# Altium PCB uTCA_MCH_PCB3.pcbdoc (part 4 of 8)
Units mm, origin at the board's own origin, x right, y up, seen from the top; angles counter-clockwise.
Board outline 182.75 x 75.8 mm, 10 copper layers (Top Layer, GND1, MidLayer1, PWR1, Mid-Layer 2, GND2, PWR2, Mid-Layer 3, GND3, Bottom Layer), stack 1.568 mm thick; 778 components, 977 nets, 4756 pads, 1214 vias.
Unrouted connection lines stored in the file: 1790.
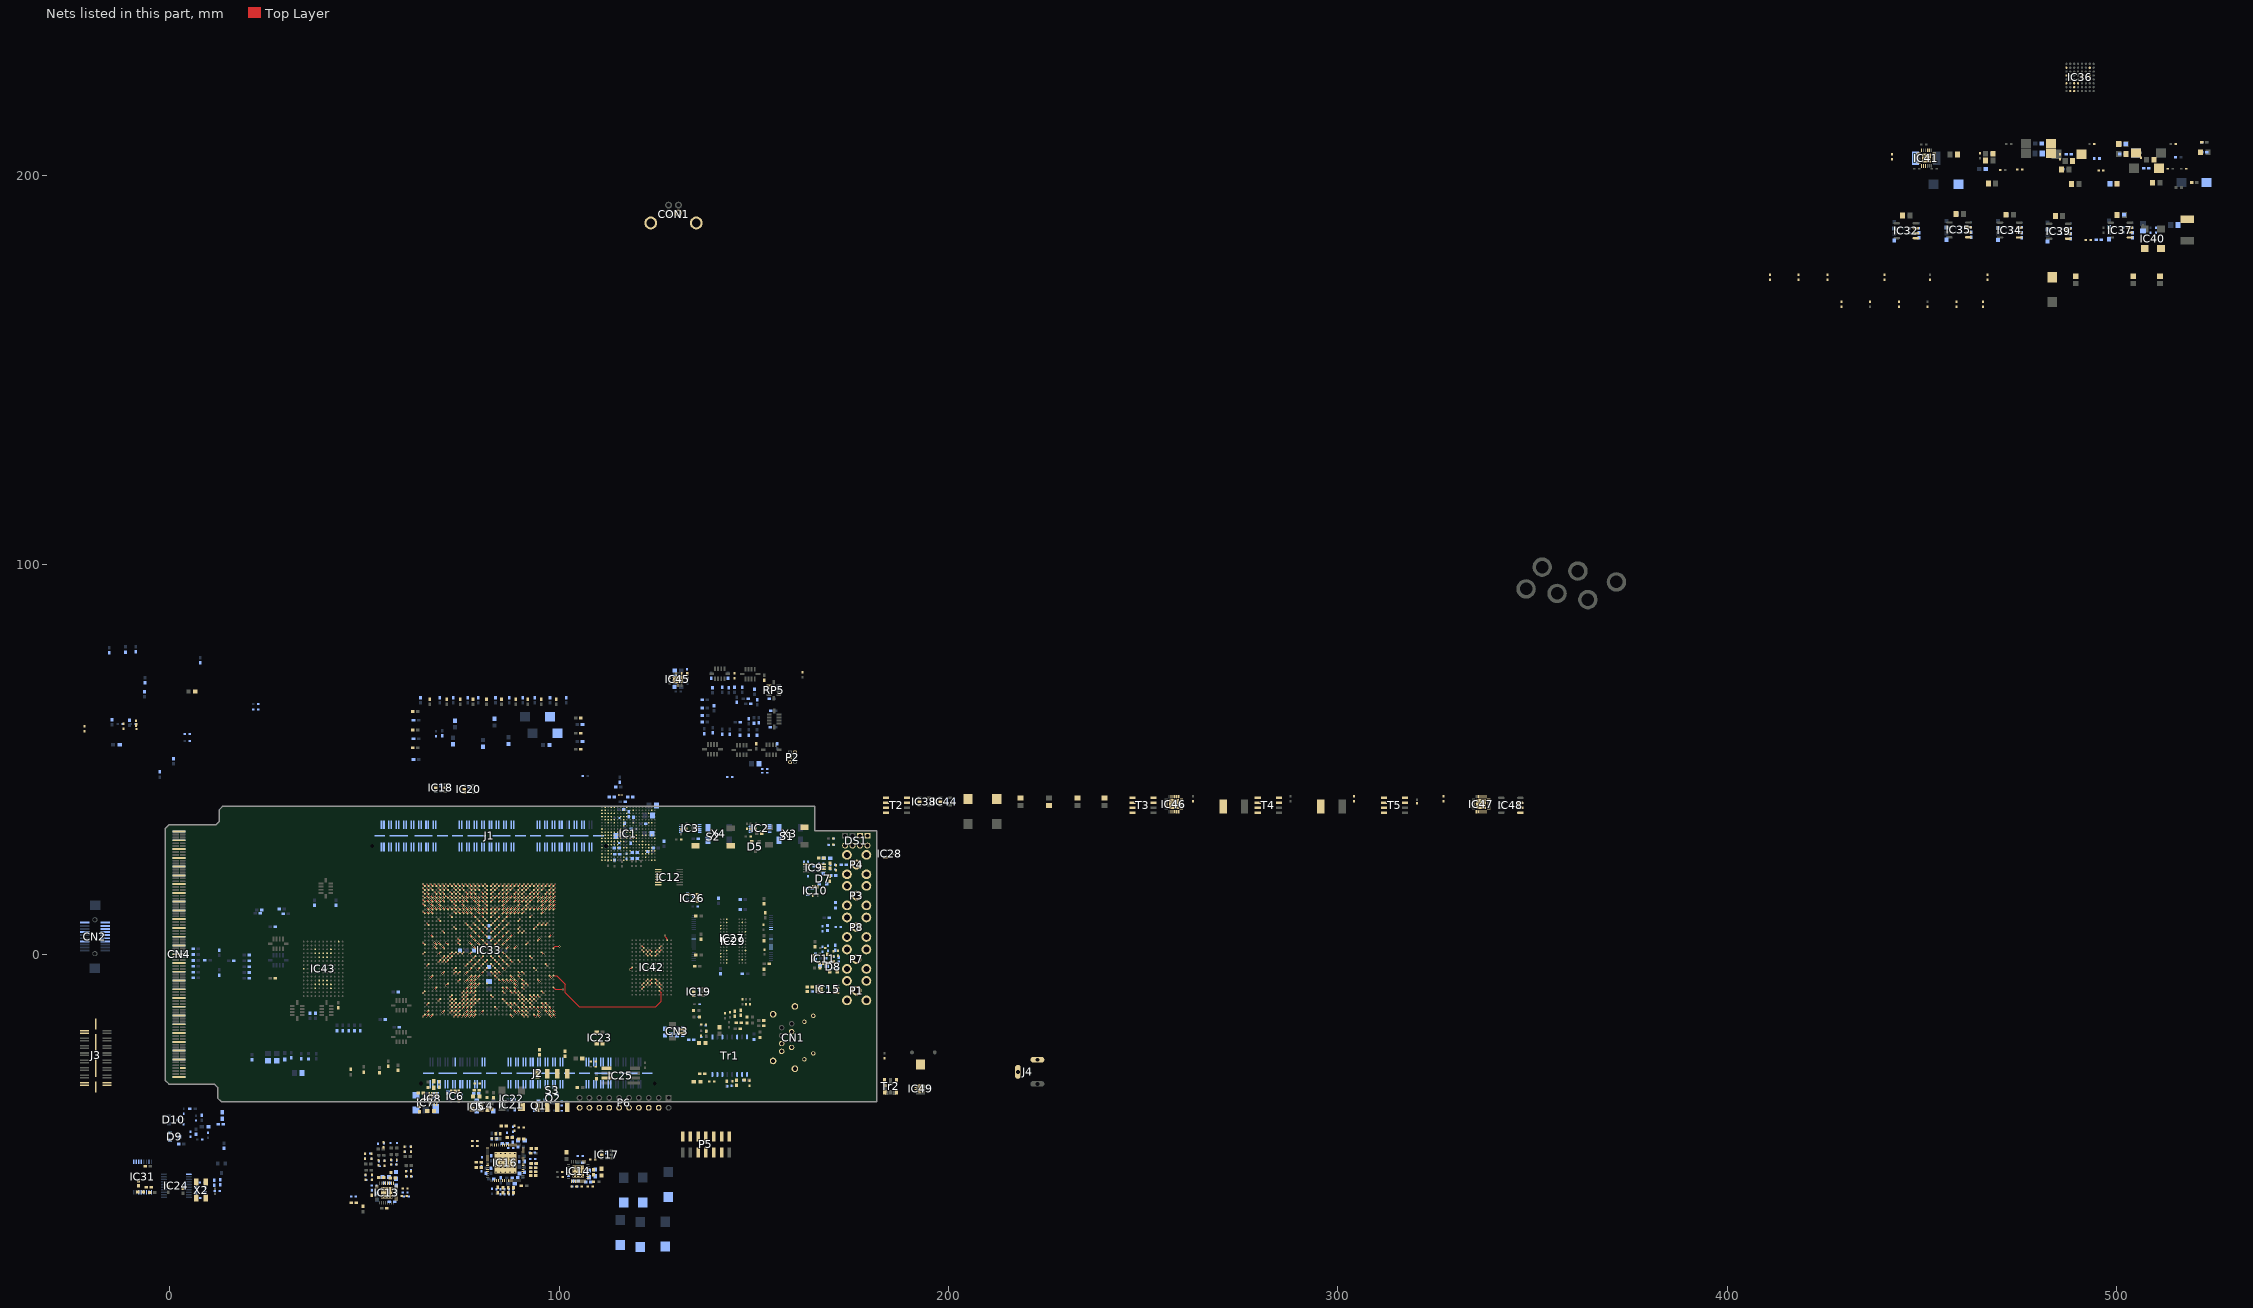
[diagram p12: the nets of this part, all layers, seen from the top]

## Via types
v1: diameter 0.5, hole 0.2, Top Layer to Bottom Layer, 1149 vias
v2: diameter 0.508, hole 0.254, Top Layer to Bottom Layer, 32 vias
v3: diameter 0.66, hole 0.33, Top Layer to Bottom Layer, tented top, 29 vias
v4: diameter 0.5, hole 0.2, Top Layer to Bottom Layer, tented top, 4 vias

## Nets (pads, with @x,y where several pads share a name; then routed paths per layer and width w, separated by ;. In a path a pad name is that pad's centre, name@x,y a point inside that pad or via, vN(x,y) a via of type N, cw(c..) or ccw(c..) an arc to the next point about the centre after c; other vN are vias at no path point) (continued)
EBI1_A15: IC1.V8 IC33.P25 | length 0.7
  Top Layer w0.175: IC33.P25@85.5,-6.5 v1(86,-7)
EBI1_A16: IC1.U9 IC33.M28 | length 0.7
  Top Layer w0.175: IC33.M28@87.5,-9.5 v1(88,-10)
EBI1_A17: IC1.R9 IC33.L28 | length 0.7
  Top Layer w0.175: IC33.L28@88.5,-9.5 v1(89,-10)
EBI1_A18: IC1.T9 IC33.M32 | length 0.7
  Top Layer w0.175: IC33.M32@87.5,-13.5 v1(88,-14)
EBI1_A19: IC1.P9 IC33.L33 | length 0.7
  Top Layer w0.175: IC33.L33@88.5,-14.5 v1(89,-15)
EBI1_A20: IC1.V9 IC33.P27 | length 0.7
  Top Layer w0.175: IC33.P27@85.5,-8.5 v1(86,-9)
EBI1_A21: IC1.M9 IC33.N27 | length 0.7
  Top Layer w0.175: IC33.N27@86.5,-8.5 v1(87,-9)
EBI1_A22: IC1.N9 IC33.P30 | length 0.7
  Top Layer w0.175: IC33.P30@85.5,-11.5 v1(86,-12)
EBI1_D0: IC1.T10 IC33.J29 | length 0.7
  Top Layer w0.175: IC33.J29@90.5,-10.5 v1(91,-11)
EBI1_D1: IC1.R10 IC33.K28 | length 0.7
  Top Layer w0.175: IC33.K28@89.5,-9.5 v1(90,-10)
EBI1_D2: IC1.N10 IC33.B34 | length 0.7
  Top Layer w0.175: IC33.B34@97.5,-15.5 v1(98,-16)
EBI1_D3: IC1.U11 IC33.C33 | length 0.7
  Top Layer w0.175: IC33.C33@96.5,-14.5 v1(97,-15)
EBI1_D4: IC1.P12 IC33.H30 | length 0.7
  Top Layer w0.175: IC33.H30@91.5,-11.5 v1(92,-12)
EBI1_D5: IC1.V11 IC33.G31 | length 0.7
  Top Layer w0.175: IC33.G31@92.5,-12.5 v1(93,-13)
EBI1_D6: IC1.N11 IC33.B33 | length 0.7
  Top Layer w0.175: IC33.B33@97.5,-14.5 v1(98,-15)
EBI1_D7: IC1.T11 IC33.A33 | length 0.7
  Top Layer w0.175: IC33.A33@98.5,-14.5 v1(99,-15)
EBI1_D8: IC1.R11 IC33.G30 | length 0.7
  Top Layer w0.175: IC33.G30@92.5,-11.5 v1(93,-12)
EBI1_D9: IC1.N12 IC33.F30 | length 0.7
  Top Layer w0.175: IC33.F30@93.5,-11.5 v1(94,-12)
EBI1_D10: IC1.P13 IC33.E33 | length 0.7
  Top Layer w0.175: IC33.E33@94.5,-14.5 v1(95,-15)
EBI1_D11: IC1.V12 IC33.E32 | length 0.7
  Top Layer w0.175: IC33.E32@94.5,-13.5 v1(95,-14)
EBI1_D12: IC1.R12 IC33.J27 | length 0.7
  Top Layer w0.175: IC33.J27@90.5,-8.5 v1(91,-9)
EBI1_D13: IC1.U12 IC33.J26 | length 0.7
  Top Layer w0.175: IC33.J26@90.5,-7.5 v1(91,-8)
EBI1_D14: IC1.T12 IC33.B32 | length 0.7
  Top Layer w0.175: IC33.B32@97.5,-13.5 v1(98,-14)
EBI1_D15: IC1.R13 IC33.C32 | length 0.7
  Top Layer w0.175: IC33.C32@96.5,-13.5 v1(97,-14)
EBI1_D16: IC1.P3 IC33.J32 | length 0.7
  Top Layer w0.175: IC33.J32@90.5,-13.5 v1(91,-14)
EBI1_D17: IC1.U1 IC33.J31 | length 0.7
  Top Layer w0.175: IC33.J31@90.5,-12.5 v1(91,-13)
EBI1_D18: IC1.R3 IC33.L26 | length 0.7
  Top Layer w0.175: IC33.L26@88.5,-7.5 v1(89,-8)
EBI1_D19: IC1.T3 IC33.L25 | length 0.7
  Top Layer w0.175: IC33.L25@88.5,-6.5 v1(89,-7)
EBI1_D20: IC1.U2 IC33.H32 | length 0.7
  Top Layer w0.175: IC33.H32@91.5,-13.5 v1(92,-14)
EBI1_D21: IC1.T4 IC33.G32 | length 0.7
  Top Layer w0.175: IC33.G32@92.5,-13.5 v1(93,-14)
EBI1_D22: IC1.V2 IC33.J34 | length 0.7
  Top Layer w0.175: IC33.J34@90.5,-15.5 v1(91,-16)
EBI1_D23: IC1.U3 IC33.K33 | length 0.7
  Top Layer w0.175: IC33.K33@89.5,-14.5 v1(90,-15)
EBI1_D24: IC1.U4 IC33.D32 | length 0.7
  Top Layer w0.175: IC33.D32@95.5,-13.5 v1(96,-14)
EBI1_D25: IC1.R4 IC33.D31 | length 0.7
  Top Layer w0.175: IC33.D31@95.5,-12.5 v1(96,-13)
EBI1_D26: IC1.T5 IC33.H33 | length 0.7
  Top Layer w0.175: IC33.H33@91.5,-14.5 v1(92,-15)
EBI1_D27: IC1.V3 IC33.H34 | length 0.7
  Top Layer w0.175: IC33.H34@91.5,-15.5 v1(92,-16)
EBI1_D28: IC1.U5 IC33.K29 | length 0.7
  Top Layer w0.175: IC33.K29@89.5,-10.5 v1(90,-11)
EBI1_D29: IC1.V4 IC33.J30 | length 0.7
  Top Layer w0.175: IC33.J30@90.5,-11.5 v1(91,-12)
EBI1_D30: IC1.R5 IC33.F34 | length 0.7
  Top Layer w0.175: IC33.F34@93.5,-15.5 v1(94,-16)
EBI1_D31: IC1.T6 IC33.E34 | length 0.7
  Top Layer w0.175: IC33.E34@94.5,-15.5 v1(95,-16)
EBI1_NBS1: IC1.V10 IC33.L31 | length 0.7
  Top Layer w0.175: IC33.L31@88.5,-12.5 v1(89,-13)
EBI1_NCS0: IC1.P10 IC33.K32 | length 0.7
  Top Layer w0.175: IC33.K32@89.5,-13.5 v1(90,-14)
EBI1_NRD: IC1.U10 IC33.M25 | length 0.7
  Top Layer w0.175: IC33.M25@87.5,-6.5 v1(88,-7)
EBI1_NWAIT: IC1.P6 IC33.M31 | length 0.7
  Top Layer w0.175: IC33.M31@87.5,-12.5 v1(88,-13)
EBI1_NWE: IC1.P11 IC33.N25 | length 0.7
  Top Layer w0.175: IC33.N25@86.5,-6.5 v1(87,-7)
ETH_100MHZ.LED_ACT: CN1.10 IC41.3
ETH_100MHZ.LED_LINK: CN1.11 IC41.2 R199.2
ETH_100MHZ.RX_N: CN1.6 Tr1.9
ETH_100MHZ.RX_P: CN1.3 Tr1.11
ETH_100MHZ.SHIELD: C214.1 CN1.0 Tr1.10 Tr1.15
ETH_100MHZ.TX_N: CN1.2 Tr1.14
ETH_100MHZ.TX_P: CN1.1 Tr1.16
EXT_PROGRAM_B: D9.1 J1.85
EXT_VBB: C47.2 IC9.4 IC10.3
FPGA_25MHZ_CLK_N: IC21.3 IC33.K23 | length 0.7
  Top Layer w0.125: IC33.K23@89.5,-4.5 v1(90,-5)
FPGA_25MHZ_CLK_P: IC21.4 IC33.K24 | length 0.7
  Top Layer w0.125: IC33.K24@89.5,-5.5 v1(90,-6)
FPGA_CCLK: IC1.K16 R158.1
FPGA_DIN: IC1.K18 R179.2
FPGA_DONE: DS1.6 IC1.L17 J1.87 Q1.3
FPGA_GCLK_N: IC33.E11 J1.91 | length 0.7
  Top Layer w0.125: IC33.E11@94.5,7.5 v1(95,8)
FPGA_GCLK_P: IC33.D11 J1.89 | length 0.7
  Top Layer w0.125: IC33.D11@95.5,7.5 v1(96,8)
FPGA_GPIO0: IC33.AC25 J2.2 | length 0.7
  Top Layer w0.175: v1(76,-7) IC33.AC25@76.5,-6.5
FPGA_GPIO1: IC33.AB25 J2.4 | length 0.7
  Top Layer w0.175: v1(77,-7) IC33.AB25@77.5,-6.5
FPGA_GPIO2: IC33.AF31 J2.6 | length 0.7
  Top Layer w0.175: v1(73,-13) IC33.AF31@73.5,-12.5
FPGA_GPIO3: IC33.AG31 J2.8 | length 0.7
  Top Layer w0.175: v1(72,-13) IC33.AG31@72.5,-12.5
FPGA_GPIO4: IC33.AB26 J2.10 | length 0.7
  Top Layer w0.175: v1(77,-8) IC33.AB26@77.5,-7.5
FPGA_GPIO5: IC33.AA26 J2.12 | length 0.7
  Top Layer w0.175: v1(78,-8) IC33.AA26@78.5,-7.5
FPGA_GPIO6: IC33.AG32 J2.14 | length 0.7
  Top Layer w0.175: v1(72,-14) IC33.AG32@72.5,-13.5
FPGA_GPIO7: IC33.AG33 J2.16 | length 0.7
  Top Layer w0.175: v1(72,-15) IC33.AG33@72.5,-14.5
FPGA_GPIO8: IC33.AC27 J2.18 | length 0.7
  Top Layer w0.175: v1(76,-9) IC33.AC27@76.5,-8.5
FPGA_GPIO9: IC33.AB27 J2.20 | length 0.7
  Top Layer w0.175: v1(77,-9) IC33.AB27@77.5,-8.5
FPGA_GPIO10: IC33.AE32 J2.22 | length 0.7
  Top Layer w0.175: v1(74,-14) IC33.AE32@74.5,-13.5
FPGA_GPIO11: IC33.AD32 J2.24 | length 0.7
  Top Layer w0.175: v1(75,-14) IC33.AD32@75.5,-13.5
FPGA_GPIO12: IC33.AC28 J2.26 | length 0.7
  Top Layer w0.175: v1(76,-10) IC33.AC28@76.5,-9.5
FPGA_GPIO13: IC33.AB28 J2.28 | length 0.7
  Top Layer w0.175: v1(77,-10) IC33.AB28@77.5,-9.5
FPGA_GPIO14: IC33.AC32 J2.30 | length 0.7
  Top Layer w0.175: v1(76,-14) IC33.AC32@76.5,-13.5
FPGA_GPIO15: IC33.AB32 J2.32 | length 0.7
  Top Layer w0.175: v1(77,-14) IC33.AB32@77.5,-13.5
FPGA_GPIO16: IC33.AC29 J2.34 | length 0.7
  Top Layer w0.175: v1(76,-11) IC33.AC29@76.5,-10.5
FPGA_GPIO17: IC33.AD29 J2.36 | length 0.7
  Top Layer w0.175: v1(75,-11) IC33.AD29@75.5,-10.5
FPGA_GPIO18: IC33.AF33 J2.38 | length 0.7
  Top Layer w0.175: v1(73,-15) IC33.AF33@73.5,-14.5
FPGA_GPIO19: IC33.AE33 J2.40 | length 0.7
  Top Layer w0.175: v1(74,-15) IC33.AE33@74.5,-14.5
FPGA_GPIO20: IC33.AC30 J2.42 | length 0.7
  Top Layer w0.175: v1(76,-12) IC33.AC30@76.5,-11.5
FPGA_GPIO21: IC33.AD30 J2.44 | length 0.7
  Top Layer w0.175: v1(75,-12) IC33.AD30@75.5,-11.5
FPGA_GPIO22: IC33.AF34 J2.46 | length 0.7
  Top Layer w0.175: v1(73,-16) IC33.AF34@73.5,-15.5
FPGA_GPIO23: IC33.AE34 J2.48 | length 0.7
  Top Layer w0.175: v1(74,-16) IC33.AE34@74.5,-15.5
FPGA_GPIO24: IC33.AA29 J2.50 | length 0.7
  Top Layer w0.175: v1(78,-11) IC33.AA29@78.5,-10.5
FPGA_GPIO25: IC33.AA28 J2.52 | length 0.7
  Top Layer w0.175: v1(78,-10) IC33.AA28@78.5,-9.5
FPGA_GPIO26: IC33.Y26 J2.54 | length 0.7
  Top Layer w0.175: v1(79,-8) IC33.Y26@79.5,-7.5
FPGA_GPIO27: IC33.AA25 J2.56 | length 0.7
  Top Layer w0.175: v1(78,-7) IC33.AA25@78.5,-6.5
FPGA_GPIO28: IC33.AD31 J2.58 | length 0.7
  Top Layer w0.175: v1(75,-13) IC33.AD31@75.5,-12.5
FPGA_GPIO29: IC33.AE31 J2.60 | length 0.7
  Top Layer w0.175: v1(74,-13) IC33.AE31@74.5,-12.5
FPGA_GPIO30: IC33.AB33 J2.62 | length 0.7
  Top Layer w0.175: v1(77,-15) IC33.AB33@77.5,-14.5
FPGA_GPIO31: IC33.AC33 J2.64 | length 0.7
  Top Layer w0.175: v1(76,-15) IC33.AC33@76.5,-14.5
FPGA_GPIO32: IC33.AB31 J2.66 | length 0.7
  Top Layer w0.175: v1(77,-13) IC33.AB31@77.5,-12.5
FPGA_GPIO33: IC33.AB30 J2.68 | length 0.7
  Top Layer w0.175: v1(77,-12) IC33.AB30@77.5,-11.5
FPGA_GPIO34: IC33.AC34 J2.70 | length 0.7
  Top Layer w0.175: v1(76,-16) IC33.AC34@76.5,-15.5
FPGA_GPIO35: IC33.AD34 J2.72 | length 0.7
  Top Layer w0.175: v1(75,-16) IC33.AD34@75.5,-15.5
FPGA_GPIO36: IC33.AA31 J2.74 | length 0.7
  Top Layer w0.175: v1(78,-13) IC33.AA31@78.5,-12.5
FPGA_GPIO37: IC33.AA30 J2.76 | length 0.7
  Top Layer w0.175: v1(78,-12) IC33.AA30@78.5,-11.5
FPGA_GPIO38: IC33.AA33 J2.78 | length 0.7
  Top Layer w0.175: v1(78,-15) IC33.AA33@78.5,-14.5
FPGA_GPIO39: IC33.AA34 J2.80 | length 0.7
  Top Layer w0.175: v1(78,-16) IC33.AA34@78.5,-15.5
FPGA_INIT_B: IC1.L18 J1.83 Q2.2 R163.1
FPGA_JTAG.FPGA_TCK: IC33.AE8 P5.6 | length 0.7
  Top Layer w0.175: v1(74,11) IC33.AE8@74.5,10.5
FPGA_JTAG.FPGA_TDI: IC33.AD8 P5.8 | length 0.7
  Top Layer w0.175: v1(75,11) IC33.AD8@75.5,10.5
FPGA_JTAG.FPGA_TDO: IC33.AC8 P5.10 | length 0.7
  Top Layer w0.175: v1(76,11) IC33.AC8@76.5,10.5
FPGA_JTAG.FPGA_TMS: IC33.AF8 P5.4 | length 0.7
  Top Layer w0.175: v1(73,11) IC33.AF8@73.5,10.5
FPGA_RS232_RXD: IC31.9 R218.1
FPGA_RS232_TXD: IC31.10 IC33.AJ17 | length 0.7
  Top Layer w0.175: v1(70,2) IC33.AJ17@70.5,1.5
FPGA_WD.FPGA_WD_INT: IC3.8 IC33.AC23 R17.1 | length 0.7
  Top Layer w0.175: v1(76,-5) IC33.AC23@76.5,-4.5
FPGA_WD.FPGA_WD_PROGRAM: D9.2 IC3.4 S2.2
FPGA_WD.FPGA_WD_SCL: IC3.7 IC33.T24 R19.1 | length 0.7
  Top Layer w0.175: IC33.T24@83.5,-5.5 v1(84,-6)
FPGA_WD.FPGA_WD_SDA: IC3.6 IC33.T23 R18.1 | length 0.7
  Top Layer w0.175: IC33.T23@83.5,-4.5 v1(84,-5)
FREE_GC1_N: IC33.K12 J3.30 | length 0.7
  Top Layer w0.125: IC33.K12@89.5,6.5 v1(90,7)
FREE_GC1_P: IC33.K13 J3.32 | length 0.7
  Top Layer w0.125: IC33.K13@89.5,5.5 v1(90,6)
FREE_MRCC_N: IC33.AG30 J3.3 | length 0.7
  Top Layer w0.125: v1(72,-12) IC33.AG30@72.5,-11.5
FREE_MRCC_P: IC33.AF30 J3.1 | length 0.7
  Top Layer w0.125: v1(73,-12) IC33.AF30@73.5,-11.5
FREE_SRCC_N: IC33.AN34 J3.2 | length 0.7
  Top Layer w0.125: v1(66,-16) IC33.AN34@66.5,-15.5
FREE_SRCC_P: IC33.AN33 J3.4 | length 0.7
  Top Layer w0.125: v1(66,-15) IC33.AN33@66.5,-14.5
GND: C1.1 C2.1 C3.1 C4.1 C5.2 C6.2 C7.2 C8.2 C9.2 C10.2 C11.2 C12.2 C13.2 C14.2 C15.2 C16.2 C17.2 C18.2 C19.1 C20.1 C21.1 C22.1 C23.1 C24.2 C25.1 C26.1 C27.1 C28.1 C29.1 C30.1 C31.1 C32.1 C33.2 C34.1 C35.2 C36.1 C37.2 C38.1 C39.1 C40.2 C41.1 C42.2 C43.1 C44.2 C45.1 C47.1 C48.1 C49.1 C50.2 C51.1 C52.1 C53.2 C55.1 C56.1 C57.1 C58.1 C59.1 C60.1 C61.1 C62.1 C63.1 C64.1 C65.1 C66.1 C67.1 C69.1 C70.1 C71.2 C72.2 C73.2 C74.1 C75.1 C76.1 C77.2 C78.2 C79.2 C80.2 C81.2 C82.2 C83.2 C84.1 C85.1 C86.1 C87.2 C91.1 C92.1 C93.1 C94.1 C95.1 C96.1 C97.2 C98.2 C100.1 C104.1 C105.2 C106.1 C107.2 C108.1 C109.2 C110.1 C111.2 C112.1 C113.2 C114.1 C115.2 C116.1 C117.2 C118.1 C119.2 C120.1 C121.2 C123.1 C124.2 C126.1 C127.2 C128.1 C129.2 C130.1 C131.2 C132.1 C133.2 C134.1 C135.2 C136.1 C137.2 C140.2 C141.1 C142.1 C143.1 C144.2 C145.2 C146.1 C147.1 C148.1 C149.1 C150.1 C151.2 C152.1 C153.1 C155.2 C156.2 C157.2 C158.2 C159.2 C160.2 C161.1 C163.1 C165.2 C167.2 C169.1 C171.1 C172.1 C173.1 C174.1 C175.2 C176.1 C177.1 C178.1 C180.1 C181.1 C183.1 C184.1 C186.1 C187.1 C191.2 C192.2 C193.2 C194.2 C217.1 C218.1 C219.2 C220.1 C221.1 C222.1 C223.2 C224.2 C225.2 C226.2 C227.2 C228.2 C229.2 C230.2 C231.2 C232.2 C233.2 C234.2 C235.1 C236.1 C237.1 C238.2 C239.2 C241.1 C244.2 C245.1 C246.1 C247.1 C248.2 C249.2 C250.1 C251.1 C252.1 C254.2 C255.1 C256.2 C257.2 C258.2 C259.2 C260.2 C262.1 C263.1 C264.1 C265.1 C266.1 C267.1 C268.2 C269.1 C270.2 C271.2 C272.1 C273.2 C274.1 C275.2 C276.1 C277.2 C278.2 C279.2 C280.2 C281.1 C282.1 C283.1 C284.1 C285.1 C286.1 C287.1 C288.2 C289.2 C290.2 C291.2 C292.2 C294.2 C295.1 C296.2 C297.1 C298.1 C299.2 C300.2 C301.2 C302.2 C303.1 C304.2 C305.2 C306.2 C307.2 C309.2 C310.1 C311.1 C312.1 C322.1 C323.2 C329.1 C330.1 C331.1 C332.1 C333.1 C334.1 C335.1 C336.1 C337.2 C338.2 C339.2 C340.2 C341.2 C342.2 C343.2 C344.2 C345.2 C346.2 C347.2 C348.2 C349.1 C350.1 C351.1 C352.1 C353.1 C354.1 C355.1 C356.1 C357.1 C358.1 C359.1 C360.1 C361.2 C362.2 C363.2 C364.2 C365.2 C366.2 C367.2 C368.2 C369.2 C370.2 C371.2 C372.2 C373.1 C374.1 C375.1 C376.1 C377.2 C378.2 C379.2 C380.2 C381.2 C382.2 C383.2 C384.2 C385.2 C386.2 C387.2 C388.2 C389.2 C390.2 C391.2 C392.2 C393.1 C394.1 C395.1 C396.2 C397.2 C398.1 C399.1 C400.1 C401.1 C402.1 C403.1 C404.1 C405.1 C406.2 C407.2 C408.2 C409.2 C410.2 C411.2 C412.2 C413.2 C414.1 C415.1 C416.1 C417.2 C418.1 C419.1 C420.1 C421.1 C427.2 C428.2 C429.2 C430.1 C431.2 C432.2 CN2.7 CN2.8 CN2.9 CN2.11 CN2.13 CN2.14 CN2.15 CN2.17 CN2.19 CN2.20 CN3.1 CN4.1 CN4.4 CN4.7 CN4.10 CN4.13 CN4.16 CN4.19 CN4.22 CN4.25 CN4.28 CN4.31 CN4.34 CN4.37 CN4.40 CN4.43 CN4.46 CN4.49 CN4.52 CN4.55 CN4.58 CN4.61 CN4.64 CN4.67 CN4.70 CN4.73 CN4.76 CN4.79 CN4.82 CN4.85 CN4.86 CN4.89 CN4.92 CN4.95 CN4.98 CN4.101 CN4.104 CN4.107 CN4.110 CN4.113 CN4.116 CN4.119 CN4.122 CN4.125 CN4.128 CN4.131 CN4.134 CN4.137 CN4.140 CN4.143 CN4.146 CN4.149 CN4.152 CN4.155 CN4.158 CN4.161 CN4.164 CN4.167 CN4.170 CON1.0 CON1.4 DS1.8 IC1.C16 IC1.G8 IC1.G10 IC1.G11 IC1.G12 IC1.H9 IC1.H11 IC1.J9 IC1.J10 IC1.J11 IC1.K9 IC1.K11 IC1.L12 IC1.M11 IC1.M12 IC1.N13 IC1.N14 IC1.T17 IC1.V16 IC1.V17 IC2.3 IC2.5 IC3.3 IC3.5 IC4.2 IC5.8 IC6.2 IC7.3 IC8.8 IC9.5 IC10.2 IC11.2 IC12.1 IC12.4 IC12.7 IC13.10 IC13.22 IC13.PAD IC14.10 IC14.22 IC14.PAD IC15.5 IC16.37 IC16.44 IC16.59 IC16.PAD IC17.2 IC18.2 IC18.5 IC19.2 IC19.3 IC20.2 IC20.3 IC21.2 IC22.2 IC23.2 IC24.11 IC25.7 IC26.3 IC27.13 IC27.36 IC28.2 IC29.A3 IC29.B3 IC29.B8 IC29.C1 IC29.D1 IC29.E9 IC29.F1 IC29.L3 IC29.L9 IC29.M1 IC29.N1 IC29.P3 IC29.P8 IC29.R3 IC31.15 IC32.5 IC33.A1 IC33.A2 IC33.A5 IC33.A6 IC33.A7 IC33.A17 IC33.A27 IC33.A34 IC33.AA1 IC33.AA2 IC33.AA5 IC33.AA7 IC33.AA9 IC33.AA11 IC33.AA13 IC33.AA15 IC33.AA17 IC33.AA19 IC33.AA21 IC33.AA27 IC33.AB3 IC33.AB4 IC33.AB7 IC33.AB8 IC33.AB12 IC33.AB14 IC33.AB16 IC33.AB18 IC33.AB20 IC33.AB22 IC33.AB24 IC33.AB34 IC33.AC1 IC33.AC5 IC33.AC7 IC33.AC11 IC33.AC21 IC33.AC31 IC33.AD4 IC33.AD7 IC33.AD18 IC33.AD28 IC33.AE1 IC33.AE2 IC33.AE5 IC33.AE7 IC33.AE15 IC33.AE25 IC33.AF3 IC33.AF4 IC33.AF7 IC33.AF12 IC33.AF22 IC33.AF32 IC33.AG1 IC33.AG5 IC33.AG7 IC33.AG9 IC33.AG19 IC33.AG29 IC33.AH4 IC33.AH7 IC33.AH16 IC33.AH26 IC33.AJ1 IC33.AJ2 IC33.AJ5 IC33.AJ7 IC33.AJ13 IC33.AJ23 IC33.AJ33 IC33.AK3 IC33.AK4 IC33.AK7 IC33.AK10 IC33.AK20 IC33.AK30 IC33.AL1 IC33.AL5 IC33.AL7 IC33.AL17 IC33.AL27 IC33.AM4 IC33.AM7 IC33.AM8 IC33.AM14 IC33.AM24 IC33.AM34 IC33.AN1 IC33.AN2 IC33.AN5 IC33.AN8 IC33.AN11 IC33.AN21 IC33.AN31 IC33.AP3 IC33.AP4 IC33.AP8 IC33.AP18 IC33.AP28 IC33.AP34 IC33.B3 IC33.B4 IC33.B7 IC33.B14 IC33.B24 IC33.C1 IC33.C5 IC33.C7 IC33.C11 IC33.C21 IC33.C31 IC33.D4 IC33.D7 IC33.D8 IC33.D18 IC33.D28 IC33.E1 IC33.E2 IC33.E5 IC33.E7 IC33.E15 IC33.E25 IC33.F3 IC33.F4 IC33.F7 IC33.F12 IC33.F22 IC33.F32 IC33.G1 IC33.G5 IC33.G7 IC33.G9 IC33.G19 IC33.G29 IC33.H4 IC33.H7 IC33.H16 IC33.H26 IC33.J1 IC33.J2 IC33.J5 IC33.J7 IC33.J8 IC33.J13 IC33.J23 IC33.J33 IC33.K3 IC33.K4 IC33.K7 IC33.K10 IC33.K20 IC33.K30 IC33.L1 IC33.L5 IC33.L7 IC33.L17 IC33.L27 IC33.M4 IC33.M7 IC33.M14 IC33.M20 IC33.M24 IC33.M34 IC33.N1 IC33.N2 IC33.N5 IC33.N7 IC33.N8 IC33.N9 IC33.N11 IC33.N13 IC33.N15 IC33.N17 IC33.N19 IC33.N21 IC33.N31 IC33.P3 IC33.P4 IC33.P7 IC33.P10 IC33.P12 IC33.P14 IC33.P16 IC33.P18 IC33.P20 IC33.P22 IC33.P28 IC33.R1 IC33.R5 IC33.R7 IC33.R9 IC33.R11 IC33.R13 IC33.R15 IC33.R17 IC33.R19 IC33.R21 IC33.R23 IC33.R25 IC33.T4 IC33.T7 IC33.T8 IC33.T10 IC33.T12 IC33.T14 IC33.T16 IC33.T20 IC33.T22 IC33.T32 IC33.U1 IC33.U2 IC33.U5 IC33.U7 IC33.U9 IC33.U11 IC33.U13 IC33.U15 IC33.U19 IC33.U21 IC33.U29 IC33.V3 IC33.V4 IC33.V7 IC33.V10 IC33.V12 IC33.V14 IC33.V16 IC33.V20 IC33.V22 IC33.V26 IC33.W1 IC33.W5 IC33.W7 IC33.W9 IC33.W11 IC33.W13 IC33.W15 IC33.W19 IC33.W21 IC33.W23 IC33.W33 IC33.Y4 IC33.Y5 IC33.Y6 IC33.Y7 IC33.Y8 IC33.Y10 IC33.Y12 IC33.Y14 IC33.Y16 IC33.Y18 IC33.Y20 IC33.Y22 IC33.Y30 IC34.5 IC35.5 IC36.B2 IC36.H2 IC36.H4 IC36.H6 IC37.5 IC38.2 IC39.5 IC42.C4 IC42.C8 IC42.D4 IC42.D5 IC42.D6 IC42.D7 IC42.D8 IC42.E5 IC42.E6 IC42.E7 IC42.L5 IC42.L6 IC42.L7 IC42.M4 IC42.M5 IC42.M6 IC42.M7 IC42.M8 IC42.N4 IC42.N8 IC42.R2 IC43.C4 IC43.C8 IC43.D4 IC43.D5 IC43.D6 IC43.D7 IC43.D8 IC43.E5 IC43.E6 IC43.E7 IC43.L5 IC43.L6 IC43.L7 IC43.M4 IC43.M5 IC43.M6 IC43.M7 IC43.M8 IC43.N4 IC43.N8 IC43.R2 IC44.2 IC45.4 IC45.8 IC45.11 IC46.3 IC46.4 IC46.12 IC46.19 IC46.25 IC47.3 IC47.4 IC47.12 IC47.19 IC47.25 IC48.5 IC49.9 J1.97 J1.98 J1.99 J1.100 J1.101 J1.102 J1.103 J1.104 J1.105 J1.106 J1.107 J1.108 J2.65 J2.67 J2.69 J2.71 J2.73 J2.75 J2.77 J2.79 J2.97 J2.98 J2.99 J2.100 J2.101 J2.102 J2.103 J2.104 J2.105 J2.106 J2.107 J2.108 J3.33 J3.34 J3.35 J3.36 J4.2 J4.3 L4.1 P1.2 P2.2 P3.2 P4.2 P5.1 P5.3 P5.5 P5.7 P5.9 P5.11 P5.13 P6.4 P6.6 P6.8 P6.10 P6.12 P6.14 P6.16 P6.18 P6.20 P8.2 Q1.2 R3.2 R23.1 R24.1 R36.1 R39.1 R42.2 R43.1 R50.1 R60.2 R61.1 R62.2 R63.2 R64.2 R65.1 R66.2 R67.2 R68.2 R69.1 R71.1 R72.1 R76.2 R78.2 R81.2 R82.2 R83.1 R84.2 R85.2 R86.1 R87.2 R88.2 R89.2 R91.2 R92.2 R93.2 R94.2 R96.2 R98.1 R99.1 R100.1 R102.1 R108.1 R109.1 R110.1 R111.1 R118.1 R119.1 R120.1 R122.1 R130.1 R131.1 R132.1 R134.1 R153.1 R164.1 R171.1 R174.2 R175.1 R177.1 R178.1 R182.1 R184.1 R185.1 R186.1 R187.2 R192.2 R196.1 R204.1 R209.2 R212.1 R215.1 R216.1 R217.2 R219.2 R221.2 R222.2 R226.2 R227.1 R229.2 R231.2 R232.2 R234.2 R235.1 R236.1 R238.2 R240.2 R242.2 S1.2 S2.1 S3.5 S3.6 S3.7 S3.8 T2.1 T3.1 T4.1 T5.1 Tr2.3 X2.2 X2.4 | length 198.2
  Top Layer w0.32: v1(65,-16) IC33.AP34@65.5,-15.5 ; v1(65,-10) IC33.AP28@65.5,-9.5 ; v1(65,0) IC33.AP18@65.5,0.5 ; v1(65,11) IC33.AP8@65.5,10.5 ; v1(65,15) IC33.AP4@65.5,14.5 ; v1(65,16) IC33.AP3@65.5,15.5 ; v1(66,-13) IC33.AN31@66.5,-12.5 ; v1(66,-3) IC33.AN21@66.5,-2.5 ; v1(66,8) IC33.AN11@66.5,7.5 ; v1(66,11) IC33.AN8@66.5,10.5 ; v1(66,14) IC33.AN5@66.5,13.5 ; v1(66,17) IC33.AN2@66.5,16.5 ; v1(66,18) IC33.AN1@66.5,17.5 ; v1(67,-16) IC33.AM34@67.5,-15.5 ; v1(67,-6) IC33.AM24@67.5,-5.5 ; v1(67,5) IC33.AM14@67.5,4.5 ; v1(67,11) IC33.AM8@67.5,10.5 ; v1(67,12) IC33.AM7@67.5,11.5 ; v1(67,15) IC33.AM4@67.5,14.5 ; v1(68,-9) IC33.AL27@68.5,-8.5 ; v1(68,2) IC33.AL17@68.5,1.5 ; v1(68,12) IC33.AL7@68.5,11.5 ; v1(68,14) IC33.AL5@68.5,13.5 ; v1(68,18) IC33.AL1@68.5,17.5 ; v1(69,-12) IC33.AK30@69.5,-11.5 ; v1(69,-2) IC33.AK20@69.5,-1.5 ; v1(69,9) IC33.AK10@69.5,8.5 ; v1(69,12) IC33.AK7@69.5,11.5 ; v1(69,15) IC33.AK4@69.5,14.5 ; v1(69,16) IC33.AK3@69.5,15.5 ; v1(70,-15) IC33.AJ33@70.5,-14.5 ; v1(70,-5) IC33.AJ23@70.5,-4.5 ; v1(70,6) IC33.AJ13@70.5,5.5 ; v1(70,12) IC33.AJ7@70.5,11.5 ; v1(70,14) IC33.AJ5@70.5,13.5 ; v1(70,17) IC33.AJ2@70.5,16.5 ; v1(70,18) IC33.AJ1@70.5,17.5 ; v1(71,-8) IC33.AH26@71.5,-7.5 ; v1(71,3) IC33.AH16@71.5,2.5 ; v1(71,12) IC33.AH7@71.5,11.5 ; v1(71,15) IC33.AH4@71.5,14.5 ; v1(72,-11) IC33.AG29@72.5,-10.5 ; v1(72,-1) IC33.AG19@72.5,-0.5 ; v1(72,10) IC33.AG9@72.5,9.5 ; v1(72,12) IC33.AG7@72.5,11.5 ; v1(72,14) IC33.AG5@72.5,13.5 ; v1(72,18) IC33.AG1@72.5,17.5 ; v1(73,-14) IC33.AF32@73.5,-13.5 ; v1(73,-4) IC33.AF22@73.5,-3.5 ; v1(73,7) IC33.AF12@73.5,6.5 ; v1(73,12) IC33.AF7@73.5,11.5 ; v1(73,15) IC33.AF4@73.5,14.5 ; v1(73,16) IC33.AF3@73.5,15.5 ; v1(74,-7) IC33.AE25@74.5,-6.5 ; v1(74,4) IC33.AE15@74.5,3.5 ; v1(74,12) IC33.AE7@74.5,11.5 ; v1(74,14) IC33.AE5@74.5,13.5 ; v1(74,17) IC33.AE2@74.5,16.5 ; v1(74,18) IC33.AE1@74.5,17.5 ; v1(75,-10) IC33.AD28@75.5,-9.5 ; v1(75,0) IC33.AD18@75.5,0.5 ; v1(75,12) IC33.AD7@75.5,11.5 ; v1(75,15) IC33.AD4@75.5,14.5 ; v1(76,-13) IC33.AC31@76.5,-12.5 ; v1(76,-3) IC33.AC21@76.5,-2.5 ; v1(76,8) IC33.AC11@76.5,7.5 ; v1(76,12) IC33.AC7@76.5,11.5 ; v1(76,14) IC33.AC5@76.5,13.5 ; v1(76,18) IC33.AC1@76.5,17.5 ; v1(77,-16) IC33.AB34@77.5,-15.5 ; v1(77,-6) IC33.AB24@77.5,-5.5 ; v1(77,-4) IC33.AB22@77.5,-3.5 ; v1(77,-2) IC33.AB20@77.5,-1.5 ; v1(77,0) IC33.AB18@77.5,0.5 ; v1(77,3) IC33.AB16@77.5,2.5 ; v1(77,5) IC33.AB14@77.5,4.5 ; v1(77,7) IC33.AB12@77.5,6.5 ; v1(77,11) IC33.AB8@77.5,10.5 ; v1(77,12) IC33.AB7@77.5,11.5 ; v1(77,15) IC33.AB4@77.5,14.5 ; v1(77,16) IC33.AB3@77.5,15.5 ; v1(78,-9) IC33.AA27@78.5,-8.5 ; v1(78,-3) IC33.AA21@78.5,-2.5 ; v1(78,-1) IC33.AA19@78.5,-0.5 ; v1(78,2) IC33.AA17@78.5,1.5 ; v1(78,4) IC33.AA15@78.5,3.5 ; v1(78,6) IC33.AA13@78.5,5.5 ; v1(78,8) IC33.AA11@78.5,7.5 ; v1(78,10) IC33.AA9@78.5,9.5 ; v1(78,12) IC33.AA7@78.5,11.5 ; v1(78,14) IC33.AA5@78.5,13.5 ; v1(78,17) IC33.AA2@78.5,16.5 ; v1(78,18) IC33.AA1@78.5,17.5 ; v1(79,-12) IC33.Y30@79.5,-11.5 ; v1(79,-4) IC33.Y22@79.5,-3.5 ; v1(79,-2) IC33.Y20@79.5,-1.5 ; v1(79,0) IC33.Y18@79.5,0.5 ; v1(79,3) IC33.Y16@79.5,2.5 ; v1(79,5) IC33.Y14@79.5,4.5 ; v1(79,7) IC33.Y12@79.5,6.5 ; v1(79,9) IC33.Y10@79.5,8.5 ; v1(79,11) IC33.Y8@79.5,10.5 ; v1(79,12) IC33.Y7@79.5,11.5 ; v1(79,13) IC33.Y6@79.5,12.5 ; v1(79,14) IC33.Y5@79.5,13.5 ; v1(79,15) IC33.Y4@79.5,14.5 ; v1(80,-15) IC33.W33@80.5,-14.5 ; v1(80,-5) IC33.W23@80.5,-4.5 ; v1(80,-3) IC33.W21@80.5,-2.5 ; v1(80,-1) IC33.W19@80.5,-0.5 ; v1(80,4) IC33.W15@80.5,3.5 ; v1(80,6) IC33.W13@80.5,5.5 ; v1(80,8) IC33.W11@80.5,7.5 ; v1(80,10) IC33.W9@80.5,9.5 ; v1(80,12) IC33.W7@80.5,11.5 ; v1(80,14) IC33.W5@80.5,13.5 ; v1(80,18) IC33.W1@80.5,17.5 ; v1(81,-4) IC33.V22@81.5,-3.5 ; v1(81,-2) IC33.V20@81.5,-1.5 ; v1(81,3) IC33.V16@81.5,2.5 ; v1(81,5) IC33.V14@81.5,4.5 ; v1(81,7) IC33.V12@81.5,6.5 ; v1(81,9) IC33.V10@81.5,8.5 ; v1(81,12) IC33.V7@81.5,11.5 ; v1(81,15) IC33.V4@81.5,14.5 ; v1(81,16) IC33.V3@81.5,15.5 ; IC33.U29@82.5,-10.5 v1(83,-11) ; IC33.U21@82.5,-2.5 v1(83,-3) ; IC33.U19@82.5,-0.5 v1(83,-1) ; IC33.U15@82.5,3.5 v1(83,4) ; IC33.U13@82.5,5.5 v1(83,6) ; IC33.U11@82.5,7.5 v1(83,8) ; IC33.U9@82.5,9.5 v1(83,10) ; IC33.U7@82.5,11.5 v1(83,12) ; IC33.U5@82.5,13.5 v1(83,14) ; IC33.U2@82.5,16.5 v1(83,17) ; IC33.U1@82.5,17.5 v1(83,18) ; IC33.T32@83.5,-13.5 v1(84,-14) ; IC33.T22@83.5,-3.5 v1(84,-4) ; IC33.T20@83.5,-1.5 v1(84,-2) ; IC33.T16@83.5,2.5 v1(84,3) ; IC33.T14@83.5,4.5 v1(84,5) ; IC33.T12@83.5,6.5 v1(84,7) ; IC33.T10@83.5,8.5 v1(84,9) ; IC33.T8@83.5,10.5 v1(84,11) ; IC33.T7@83.5,11.5 v1(84,12) ; IC33.T4@83.5,14.5 v1(84,15) ; IC33.R25@84.5,-6.5 v1(85,-7) ; IC33.R23@84.5,-4.5 v1(85,-5) ; IC33.R21@84.5,-2.5 v1(85,-3) ; IC33.R19@84.5,-0.5 v1(85,-1) ; IC33.R17@84.5,1.5 v1(85,2) ; IC33.R15@84.5,3.5 v1(85,4) ; IC33.R13@84.5,5.5 v1(85,6) ; IC33.R11@84.5,7.5 v1(85,8) ; IC33.R9@84.5,9.5 v1(85,10) ; IC33.R7@84.5,11.5 v1(85,12) ; IC33.R5@84.5,13.5 v1(85,14) ; IC33.R1@84.5,17.5 v1(85,18) ; IC33.P28@85.5,-9.5 v1(86,-10) ; IC33.P22@85.5,-3.5 v1(86,-4) ; IC33.P20@85.5,-1.5 v1(86,-2) ; IC33.P18@85.5,0.5 v1(86,0) ; IC33.P16@85.5,2.5 v1(86,3) ; IC33.P14@85.5,4.5 v1(86,5) ; IC33.P12@85.5,6.5 v1(86,7) ; IC33.P10@85.5,8.5 v1(86,9) ; IC33.P7@85.5,11.5 v1(86,12) ; IC33.P4@85.5,14.5 v1(86,15) ; IC33.P3@85.5,15.5 v1(86,16) ; IC33.N31@86.5,-12.5 v1(87,-13) ; IC33.N21@86.5,-2.5 v1(87,-3) ; IC33.N19@86.5,-0.5 v1(87,-1) ; IC33.N17@86.5,1.5 v1(87,2) ; IC33.N15@86.5,3.5 v1(87,4) ; IC33.N13@86.5,5.5 v1(87,6) ; IC33.N11@86.5,7.5 v1(87,8) ; IC33.N9@86.5,9.5 v1(87,10) ; IC33.N8@86.5,10.5 v1(87,11) ; IC33.N7@86.5,11.5 v1(87,12) ; IC33.N5@86.5,13.5 v1(87,14) ; IC33.N2@86.5,16.5 v1(87,17) ; IC33.N1@86.5,17.5 v1(87,18) ; IC33.M34@87.5,-15.5 v1(88,-16) ; IC33.M24@87.5,-5.5 v1(88,-6) ; IC33.M20@87.5,-1.5 v1(88,-2) ; IC33.M14@87.5,4.5 v1(88,5) ; IC33.M7@87.5,11.5 v1(88,12) ; IC33.M4@87.5,14.5 v1(88,15) ; IC33.L27@88.5,-8.5 v1(89,-9) ; IC33.L17@88.5,1.5 v1(89,2) ; IC33.L7@88.5,11.5 v1(89,12) ; IC33.L5@88.5,13.5 v1(89,14) ; IC33.L1@88.5,17.5 v1(89,18) ; IC33.K30@89.5,-11.5 v1(90,-12) ; IC33.K20@89.5,-1.5 v1(90,-2) ; IC33.K10@89.5,8.5 v1(90,9) ; IC33.K7@89.5,11.5 v1(90,12) ; IC33.K4@89.5,14.5 v1(90,15) ; IC33.K3@89.5,15.5 v1(90,16) ; IC33.J33@90.5,-14.5 v1(91,-15) ; IC33.J23@90.5,-4.5 v1(91,-5) ; IC33.J13@90.5,5.5 v1(91,6) ; IC33.J8@90.5,10.5 v1(91,11) ; IC33.J7@90.5,11.5 v1(91,12) ; IC33.J5@90.5,13.5 v1(91,14) ; IC33.J2@90.5,16.5 v1(91,17) ; IC33.J1@90.5,17.5 v1(91,18) ; IC33.H26@91.5,-7.5 v1(92,-8) ; IC33.H16@91.5,2.5 v1(92,3) ; IC33.H7@91.5,11.5 v1(92,12) ; IC33.H4@91.5,14.5 v1(92,15) ; IC33.G29@92.5,-10.5 v1(93,-11) ; IC33.G19@92.5,-0.5 v1(93,-1) ; IC33.G9@92.5,9.5 v1(93,10) ; IC33.G7@92.5,11.5 v1(93,12) ; IC33.G5@92.5,13.5 v1(93,14) ; IC33.G1@92.5,17.5 v1(93,18) ; IC33.F32@93.5,-13.5 v1(94,-14) ; IC33.F22@93.5,-3.5 v1(94,-4) ; IC33.F12@93.5,6.5 v1(94,7) ; IC33.F7@93.5,11.5 v1(94,12) ; IC33.F4@93.5,14.5 v1(94,15) ; IC33.F3@93.5,15.5 v1(94,16) ; IC33.E25@94.5,-6.5 v1(95,-7) ; IC33.E15@94.5,3.5 v1(95,4) ; IC33.E7@94.5,11.5 v1(95,12) ; IC33.E5@94.5,13.5 v1(95,14) ; IC33.E2@94.5,16.5 v1(95,17) ; IC33.E1@94.5,17.5 v1(95,18) ; IC33.D28@95.5,-9.5 v1(96,-10) ; IC33.D18@95.5,0.5 v1(96,0) ; IC33.D8@95.5,10.5 v1(96,11) ; IC33.D7@95.5,11.5 v1(96,12) ; IC33.D4@95.5,14.5 v1(96,15) ; IC33.C31@96.5,-12.5 v1(97,-13) ; IC33.C21@96.5,-2.5 v1(97,-3) ; IC33.C11@96.5,7.5 v1(97,8) ; IC33.C7@96.5,11.5 v1(97,12) ; IC33.C5@96.5,13.5 v1(97,14) ; IC33.C1@96.5,17.5 v1(97,18) ; IC33.B24@97.5,-5.5 v1(98,-6) ; IC33.B14@97.5,4.5 v1(98,5) ; IC33.B7@97.5,11.5 v1(98,12) ; IC33.B4@97.5,14.5 v1(98,15) ; IC33.B3@97.5,15.5 v1(98,16) ; IC33.A34@98.5,-15.5 v1(99,-16) ; IC33.A27@98.5,-8.5 99,-9 ; IC33.A17@98.5,1.5 99,2 v1(100.1,2) ; IC33.A7@98.5,11.5 v1(99,12) ; IC33.A6@98.5,12.5 v1(99,13) ; IC33.A5@98.5,13.5 v1(99,14) ; IC33.A2@98.5,16.5 v1(99,17) ; IC33.A1@98.5,17.5 v1(99,18) ; 99.05,-9.05 v1(101,-9.05) ; v1@121.2,2.15 IC42.N8@121.75,1.6 ; v1(121.25,-8.9) IC42.C8@121.75,-8.4 ; v1(121.25,-7.9) IC42.D8@121.75,-7.4 ; v1(121.25,1.1) IC42.M8@121.75,0.6 ; v1(122.25,-7.9) IC42.D7@122.75,-7.4 ; v1(122.25,-6.9) IC42.E7@122.75,-6.4 ; v1(122.25,0.1) IC42.L7@122.75,-0.4 ; v1(122.25,1.1) IC42.M7@122.75,0.6 ; v1(123.25,-7.9) IC42.D6@123.75,-7.4 ; v1(123.25,-6.9) IC42.E6@123.75,-6.4 ; v1(123.25,1.1) IC42.M6@123.75,0.6 ; v1(123.3,0.05) IC42.L6@123.75,-0.4 ; IC42.D5@124.75,-7.4 v1(125.25,-7.9) ; IC42.E5@124.75,-6.4 v1(125.25,-6.9) ; IC42.L5@124.75,-0.4 v1(125.25,0.1) ; IC42.M5@124.75,0.6 v1(125.25,1.1) ; IC42.C4@125.75,-8.4 v1(126.25,-8.9) ; IC42.D4@125.75,-7.4 v1(126.25,-7.9) ; IC42.M4@125.75,0.6 v1(126.25,1.1) ; IC42.N4@125.75,1.6 v1(126.25,2.1) ; v1(127.2,4.75) 127.2,4.45 127.75,3.9 IC42.R2@127.75,3.6
  other v1: 121.2,2.15
  other v2: 54.498,-62.495 55.26,-62.495 56.149,-62.495 56.911,-62.495 54.498,-61.733 55.26,-61.733 56.149,-61.733 56.911,-61.733 54.498,-60.781 55.26,-60.781 56.149,-60.781 56.911,-60.781 54.498,-60.082 55.26,-60.082 56.149,-60.082 56.911,-60.082 103.704,-57.031 104.466,-57.031 105.419,-57.031 106.117,-57.031 103.704,-56.269 104.466,-56.269 105.419,-56.269 106.117,-56.269 103.704,-55.38 104.466,-55.38 105.419,-55.38 106.117,-55.38 103.704,-54.618 104.466,-54.618 105.419,-54.618 106.117,-54.618
  other v3: 83.79,-55.96 84.99,-55.96 86.19,-55.96 87.39,-55.96 88.59,-55.96 83.79,-54.76 84.99,-54.76 86.19,-54.76 87.39,-54.76 88.59,-54.76 83.79,-53.56 84.99,-53.56 86.19,-53.56 87.39,-53.56 88.59,-53.56 83.79,-52.36 84.99,-52.36 86.19,-52.36 87.39,-52.36 88.59,-52.36 83.79,-51.16 84.99,-51.16 86.19,-51.16 87.39,-51.16 88.59,-51.16
GND_ETH: C68.1 C162.1 C166.1 C201.1 C202.1 C203.1 C204.1 C205.1 C206.2 C208.2 C209.2 C210.1 C211.1 C212.2 C213.2 C215.2 C216.2 CN1.9 CN1.12 IC40.2 IC41.PAD L10.2 R187.1 R192.1 R193.1 R197.2 R199.1 R200.2
  other v3: 450.5,203.85 451.7,203.85 450.5,205.05 451.7,205.05
GND_SHIELD: C214.2 L10.1
HSWAPEN: IC33.M8 S3.4 | length 0.7
  Top Layer w0.175: IC33.M8@87.5,10.5 v1(88,11)
INIT_B: IC33.P8 Q2.1 R45.2 | length 0.7
  Top Layer w0.175: IC33.P8@85.5,10.5 v1(86,11)
M0: IC33.U8 R49.1 S3.3 | length 0.7
  Top Layer w0.175: IC33.U8@82.5,10.5 v1(83,11)
M1: IC33.W8 R48.1 S3.2 | length 0.7
  Top Layer w0.175: v1(80,11) IC33.W8@80.5,10.5
M2: IC33.V8 R47.1 S3.1 | length 0.7
  Top Layer w0.175: v1(81,11) IC33.V8@81.5,10.5
MDC: IC1.T15 IC41.13
MDIO: IC1.R16 IC41.12 R159.1
MGTREFCLK112_N: C138.1 IC33.AK5 | length 0.7
  Top Layer w0.125: v1(69,14) IC33.AK5@69.5,13.5
MGTREFCLK112_P: C139.1 IC33.AK6 | length 0.7
  Top Layer w0.125: v1(69,13) IC33.AK6@69.5,12.5
MGTREFCLK113_N: C122.1 IC33.AD5 | length 0.7
  Top Layer w0.125: v1(75,14) IC33.AD5@75.5,13.5
MGTREFCLK113_P: C125.1 IC33.AD6 | length 0.7
  Top Layer w0.125: v1(75,13) IC33.AD6@75.5,12.5
MGTREFCLK114_N: C102.1 IC33.V5 | length 0.7
  Top Layer w0.125: v1(81,14) IC33.V5@81.5,13.5
MGTREFCLK114_P: C103.1 IC33.V6 | length 0.7
  Top Layer w0.125: v1(81,13) IC33.V6@81.5,12.5
MGTREFCLK115_N: C99.1 IC33.P5 | length 0.7
  Top Layer w0.125: IC33.P5@85.5,13.5 v1(86,14)
MGTREFCLK115_P: C101.1 IC33.P6 | length 0.7
  Top Layer w0.125: IC33.P6@85.5,12.5 v1(86,13)
MGTREFCLK116_N: C89.1 IC33.H5 | length 0.7
  Top Layer w0.125: IC33.H5@91.5,13.5 v1(92,14)
MGTREFCLK116_P: C90.1 IC33.H6 | length 0.7
  Top Layer w0.125: IC33.H6@91.5,12.5 v1(92,13)
MGTRX112_0_N: IC33.AP6 J1.3 | length 0.7
  Top Layer w0.125: v1(65,13) IC33.AP6@65.5,12.5
MGTRX112_0_P: IC33.AP5 J1.1 | length 0.7
  Top Layer w0.125: v1(65,14) IC33.AP5@65.5,13.5
MGTRX112_1_N: IC33.AM6 J1.7 | length 0.7
  Top Layer w0.125: v1(67,13) IC33.AM6@67.5,12.5
MGTRX112_1_P: IC33.AM5 J1.5 | length 0.7
  Top Layer w0.125: v1(67,14) IC33.AM5@67.5,13.5
MGTRX112_2_N: IC33.AL4 J1.11 | length 0.7
  Top Layer w0.125: v1(68,15) IC33.AL4@68.5,14.5
MGTRX112_2_P: IC33.AL3 J1.9 | length 0.7
  Top Layer w0.125: v1(68,16) IC33.AL3@68.5,15.5
MGTRX112_3_N: IC33.AJ4 J1.15 | length 0.7
  Top Layer w0.125: v1(70,15) IC33.AJ4@70.5,14.5
MGTRX112_3_P: IC33.AJ3 J1.13 | length 0.7
  Top Layer w0.125: v1(70,16) IC33.AJ3@70.5,15.5
MGTRX113_0_N: IC33.AG4 J1.19 | length 0.7
  Top Layer w0.125: v1(72,15) IC33.AG4@72.5,14.5
MGTRX113_0_P: IC33.AG3 J1.17 | length 0.7
  Top Layer w0.125: v1(72,16) IC33.AG3@72.5,15.5
MGTRX113_1_N: IC33.AF6 J1.23 | length 0.7
  Top Layer w0.125: v1(73,13) IC33.AF6@73.5,12.5
MGTRX113_1_P: IC33.AF5 J1.21 | length 0.7
  Top Layer w0.125: v1(73,14) IC33.AF5@73.5,13.5
MGTRX113_2_N: IC33.AE4 J1.27 | length 0.7
  Top Layer w0.125: v1(74,15) IC33.AE4@74.5,14.5
MGTRX113_2_P: IC33.AE3 J1.25 | length 0.7
  Top Layer w0.125: v1(74,16) IC33.AE3@74.5,15.5
MGTRX113_3_N: IC33.AC4 J1.31 | length 0.7
  Top Layer w0.125: v1(76,15) IC33.AC4@76.5,14.5
MGTRX113_3_P: IC33.AC3 J1.29 | length 0.7
  Top Layer w0.125: v1(76,16) IC33.AC3@76.5,15.5
MGTRX114_0_N: IC33.AA4 J1.35 | length 0.7
  Top Layer w0.125: v1(78,15) IC33.AA4@78.5,14.5
MGTRX114_0_P: IC33.AA3 J1.33 | length 0.7
  Top Layer w0.125: v1(78,16) IC33.AA3@78.5,15.5
MGTRX114_1_N: IC33.W4 J1.39 | length 0.7
  Top Layer w0.125: v1(80,15) IC33.W4@80.5,14.5
MGTRX114_1_P: IC33.W3 J1.37 | length 0.7
  Top Layer w0.125: v1(80,16) IC33.W3@80.5,15.5
MGTRX114_2_N: IC33.U4 J1.43 | length 0.7
  Top Layer w0.125: IC33.U4@82.5,14.5 v1(83,15)
MGTRX114_2_P: IC33.U3 J1.41 | length 0.7
  Top Layer w0.125: IC33.U3@82.5,15.5 v1(83,16)
MGTRX114_3_N: IC33.R4 J1.47 | length 0.7
  Top Layer w0.125: IC33.R4@84.5,14.5 v1(85,15)
MGTRX114_3_P: IC33.R3 J1.45 | length 0.7
  Top Layer w0.125: IC33.R3@84.5,15.5 v1(85,16)
MGTRX115_0_N: IC33.N4 J1.51 | length 0.7
  Top Layer w0.125: IC33.N4@86.5,14.5 v1(87,15)
MGTRX115_0_P: IC33.N3 J1.49 | length 0.7
  Top Layer w0.125: IC33.N3@86.5,15.5 v1(87,16)
MGTRX115_1_N: IC33.L4 J1.55 | length 0.7
  Top Layer w0.125: IC33.L4@88.5,14.5 v1(89,15)
MGTRX115_1_P: IC33.L3 J1.53 | length 0.7
  Top Layer w0.125: IC33.L3@88.5,15.5 v1(89,16)
MGTRX115_2_N: IC33.K6 J1.59 | length 0.7
  Top Layer w0.125: IC33.K6@89.5,12.5 v1(90,13)
MGTRX115_2_P: IC33.K5 J1.57 | length 0.7
  Top Layer w0.125: IC33.K5@89.5,13.5 v1(90,14)
MGTRX115_3_N: IC33.J4 J1.63 | length 0.7
  Top Layer w0.125: IC33.J4@90.5,14.5 v1(91,15)
MGTRX115_3_P: IC33.J3 J1.61 | length 0.7
  Top Layer w0.125: IC33.J3@90.5,15.5 v1(91,16)
MGTRX116_0_N: IC33.G4 J1.67 | length 0.7
  Top Layer w0.125: IC33.G4@92.5,14.5 v1(93,15)
MGTRX116_0_P: IC33.G3 J1.65 | length 0.7
  Top Layer w0.125: IC33.G3@92.5,15.5 v1(93,16)
MGTRX116_1_N: IC33.E4 J1.71 | length 0.7
  Top Layer w0.125: IC33.E4@94.5,14.5 v1(95,15)
MGTRX116_1_P: IC33.E3 J1.69 | length 0.7
  Top Layer w0.125: IC33.E3@94.5,15.5 v1(95,16)
MGTRX116_2_N: IC33.D6 J1.75 | length 0.7
  Top Layer w0.125: IC33.D6@95.5,12.5 v1(96,13)
MGTRX116_2_P: IC33.D5 J1.73 | length 0.7
  Top Layer w0.125: IC33.D5@95.5,13.5 v1(96,14)
MGTRX116_3_N: IC33.B6 J1.79 | length 0.7
  Top Layer w0.125: IC33.B6@97.5,12.5 v1(98,13)
MGTRX116_3_P: IC33.B5 J1.77 | length 0.7
  Top Layer w0.125: IC33.B5@97.5,13.5 v1(98,14)
MGTTX112_0_N: IC33.AP2 J1.4 | length 0.7
  Top Layer w0.125: v1(65,17) IC33.AP2@65.5,16.5
MGTTX112_0_P: IC33.AP1 J1.2 | length 0.7
  Top Layer w0.125: v1(65,18) IC33.AP1@65.5,17.5
MGTTX112_1_N: IC33.AN4 J1.8 | length 0.7
  Top Layer w0.125: v1(66,15) IC33.AN4@66.5,14.5
MGTTX112_1_P: IC33.AN3 J1.6 | length 0.7
  Top Layer w0.125: v1(66,16) IC33.AN3@66.5,15.5
MGTTX112_2_N: IC33.AM2 J1.12 | length 0.7
  Top Layer w0.125: v1(67,17) IC33.AM2@67.5,16.5
MGTTX112_2_P: IC33.AM1 J1.10 | length 0.7
  Top Layer w0.125: v1(67,18) IC33.AM1@67.5,17.5
MGTTX112_3_N: IC33.AK2 J1.16 | length 0.7
  Top Layer w0.125: v1(69,17) IC33.AK2@69.5,16.5
MGTTX112_3_P: IC33.AK1 J1.14 | length 0.7
  Top Layer w0.125: v1(69,18) IC33.AK1@69.5,17.5
MGTTX113_0_N: IC33.AH2 J1.20 | length 0.7
  Top Layer w0.125: v1(71,17) IC33.AH2@71.5,16.5
MGTTX113_0_P: IC33.AH1 J1.18 | length 0.7
  Top Layer w0.125: v1(71,18) IC33.AH1@71.5,17.5
MGTTX113_1_N: IC33.AF2 J1.24 | length 0.7
  Top Layer w0.125: v1(73,17) IC33.AF2@73.5,16.5
MGTTX113_1_P: IC33.AF1 J1.22 | length 0.7
  Top Layer w0.125: v1(73,18) IC33.AF1@73.5,17.5
MGTTX113_2_N: IC33.AD2 J1.28 | length 0.7
  Top Layer w0.125: v1(75,17) IC33.AD2@75.5,16.5
MGTTX113_2_P: IC33.AD1 J1.26 | length 0.7
  Top Layer w0.125: v1(75,18) IC33.AD1@75.5,17.5
MGTTX113_3_N: IC33.AB2 J1.32 | length 0.7
  Top Layer w0.125: v1(77,17) IC33.AB2@77.5,16.5
MGTTX113_3_P: IC33.AB1 J1.30 | length 0.7
  Top Layer w0.125: v1(77,18) IC33.AB1@77.5,17.5
MGTTX114_0_N: IC33.Y2 J1.36 | length 0.7
  Top Layer w0.125: v1(79,17) IC33.Y2@79.5,16.5
MGTTX114_0_P: IC33.Y1 J1.34 | length 0.7
  Top Layer w0.125: v1(79,18) IC33.Y1@79.5,17.5
MGTTX114_1_N: IC33.V2 J1.40 | length 0.7
  Top Layer w0.125: v1(81,17) IC33.V2@81.5,16.5
MGTTX114_1_P: IC33.V1 J1.38 | length 0.7
  Top Layer w0.125: v1(81,18) IC33.V1@81.5,17.5
MGTTX114_2_N: IC33.T2 J1.44 | length 0.7
  Top Layer w0.125: IC33.T2@83.5,16.5 v1(84,17)
MGTTX114_2_P: IC33.T1 J1.42 | length 0.7
  Top Layer w0.125: IC33.T1@83.5,17.5 v1(84,18)
MGTTX114_3_N: IC33.P2 J1.48 | length 0.7
  Top Layer w0.125: IC33.P2@85.5,16.5 v1(86,17)
MGTTX114_3_P: IC33.P1 J1.46 | length 0.7
  Top Layer w0.125: IC33.P1@85.5,17.5 v1(86,18)
MGTTX115_0_N: IC33.M2 J1.52 | length 0.7
  Top Layer w0.125: IC33.M2@87.5,16.5 v1(88,17)
MGTTX115_0_P: IC33.M1 J1.50 | length 0.7
  Top Layer w0.125: IC33.M1@87.5,17.5 v1(88,18)
MGTTX115_1_N: IC33.K2 J1.56 | length 0.7
  Top Layer w0.125: IC33.K2@89.5,16.5 v1(90,17)
MGTTX115_1_P: IC33.K1 J1.54 | length 0.7
  Top Layer w0.125: IC33.K1@89.5,17.5 v1(90,18)
MGTTX115_2_N: IC33.H2 J1.60 | length 0.7
  Top Layer w0.125: IC33.H2@91.5,16.5 v1(92,17)
MGTTX115_2_P: IC33.H1 J1.58 | length 0.7
  Top Layer w0.125: IC33.H1@91.5,17.5 v1(92,18)
MGTTX115_3_N: IC33.F2 J1.64 | length 0.7
  Top Layer w0.125: IC33.F2@93.5,16.5 v1(94,17)
MGTTX115_3_P: IC33.F1 J1.62 | length 0.7
  Top Layer w0.125: IC33.F1@93.5,17.5 v1(94,18)
MGTTX116_0_N: IC33.D2 J1.68 | length 0.7
  Top Layer w0.125: IC33.D2@95.5,16.5 v1(96,17)
MGTTX116_0_P: IC33.D1 J1.66 | length 0.7
  Top Layer w0.125: IC33.D1@95.5,17.5 v1(96,18)
MGTTX116_1_N: IC33.C4 J1.72 | length 0.7
  Top Layer w0.125: IC33.C4@96.5,14.5 v1(97,15)
MGTTX116_1_P: IC33.C3 J1.70 | length 0.7
  Top Layer w0.125: IC33.C3@96.5,15.5 v1(97,16)
MGTTX116_2_N: IC33.B2 J1.76 | length 0.7
  Top Layer w0.125: IC33.B2@97.5,16.5 v1(98,17)
MGTTX116_2_P: IC33.B1 J1.74 | length 0.7
  Top Layer w0.125: IC33.B1@97.5,17.5 v1(98,18)
MGTTX116_3_N: IC33.A4 J1.80 | length 0.7
  Top Layer w0.125: IC33.A4@98.5,14.5 v1(99,15)
MGTTX116_3_P: IC33.A3 J1.78 | length 0.7
  Top Layer w0.125: IC33.A3@98.5,15.5 v1(99,16)
NAND_ALE: IC1.C6 IC27.17
NAND_CE: IC1.H6 IC26.2 R169.1
NAND_CLE: IC1.B6 IC27.16
NAND_OE: IC1.B2 IC27.8
NAND_RB: IC1.H2 IC27.7 R168.1
NAND_WE: IC1.C3 IC27.18
NetC9_1: C9.1 C10.1 IC1.U17 IC1.V18 L1.2
NetC18_1: C18.1 C60.2 IC1.M8 IC6.5
NetC19_2: C19.2 IC1.P1 X1.1
NetC20_2: C20.2 IC1.R1 X1.2
NetC21_2: C21.2 R1.1 X2.3
NetC22_2: C22.2 R4.1 X2.1
NetC23_2: C23.2 IC1.U18 R5.1
NetC24_1: C24.1 R5.2
NetC25_2: C25.2 IC1.P18 R6.2
NetC26_2: C26.2 R6.1
NetC31_2: C31.2 C32.2 IC4.1 IC23.1 R20.2
NetC34_2: C34.2 IC5.1 L2.1
NetC38_2: C38.2 C39.2 IC7.1 R22.2
NetC40_1: C40.1 C42.1 IC7.6 L3.1
NetC41_2: C41.2 IC8.1 L9.1
NetC43_2: C43.2 D7.1 D7.2
NetC44_1: C44.1 R25.1 R26.1
NetC45_2: C45.2 IC9.3 R28.1 R29.1
NetC46_1: C46.1 P4.1 R25.2 R26.2
NetC46_2: C46.2 R27.1
NetC48_2: C48.2 C49.2 IC10.1 IC10.4 R29.2 R30.2
NetC52_2: C52.2 D8.1 D8.2
NetC53_1: C53.1 R31.1 R32.1
NetC54_1: C54.1 R31.2 R32.2 R152.1 Tr2.1
NetC54_2: C54.2 R33.1
NetC55_2: C55.2 C56.2 R35.2 R36.2 R37.2 R38.1
NetC61_2: C61.2 D1.2 D2.2 IC6.1 IC6.3
NetC89_2: C89.2 IC16.55 R92.1
NetC90_2: C90.2 IC16.56 R93.1
NetC99_2: C99.2 IC16.52 R89.1
NetC101_2: C101.2 IC16.53 R91.1
NetC102_2: C102.2 IC16.42 R88.1
NetC103_2: C103.2 IC16.43 R87.1
NetC122_2: C122.2 IC16.39 R85.1
NetC125_2: C125.2 IC16.40 R84.1
NetC138_2: C138.2 IC16.26 R82.1
NetC139_2: C139.2 IC16.25 R81.1
NetC140_1: C140.1 C141.2 C142.2 C143.2 IC13.9 IC13.16 IC13.18 IC13.20 L6.1
NetC145_1: C145.1 C147.2 C149.2 C150.2 IC14.9 IC14.16 IC14.18 IC14.20 L7.1
NetC154_1: C154.1 IC13.21
NetC154_2: C154.2 IC7.4
NetC155_1: C155.1 IC13.17
NetC156_1: C156.1 IC13.19
NetC157_1: C157.1 IC14.17
NetC158_1: C158.1 IC14.19
NetC160_1: C160.1 C161.2 C163.2 IC16.4 L8.1
NetC164_1: C164.1 C165.1 C170.1 IC16.10 R79.1
NetC164_2: C164.2 IC16.9 R80.1
NetC166_2: C166.2 IC41.22 R155.1 Tr1.8
NetC168_1: C168.1 R79.2
NetC168_2: C168.2 C170.2 IC16.5 R80.2
NetC179_2: C179.2 IC16.14 R90.1
NetC182_2: C182.2 IC16.13 R90.2
NetC185_1: C185.1 IC4.3 IC23.3
NetC185_2: C185.2 IC16.64
NetC188_2: C188.2 IC16.63
NetC201_2: C201.2 C203.2 C206.1 IC41.6
NetC202_2: C202.2 IC41.23 R154.1 Tr1.6
NetC204_2: C204.2 IC41.20 R157.1 Tr1.3
NetC205_2: C205.2 IC41.21 R156.1 Tr1.1
NetC207_1: C207.1 IC46.8
NetC207_2: C207.2 IC46.10 L11.1 T2.3 T2.7 T2.8
NetC237_2: C237.2 IC46.15 R210.1
NetC238_1: C238.1 IC46.16
NetC240_1: C240.1 IC31.4
NetC240_2: C240.2 IC31.5
NetC241_2: C241.2 IC31.6
NetC242_2: C242.2 IC31.2
NetC243_1: C243.1 IC31.1
NetC243_2: C243.2 IC31.3
NetC245_2: C245.2 IC32.6
NetC253_1: C253.1 IC46.23
NetC253_2: C253.2 IC46.21 L13.1 T3.3 T3.7 T3.8
NetC261_1: C261.1 IC47.8
NetC261_2: C261.2 IC47.10 L14.1 T4.3 T4.7 T4.8
NetC262_2: C262.2 IC34.6
NetC265_2: C265.2 IC35.6
NetC272_2: C272.2 IC47.15 R233.1
NetC273_1: C273.1 IC47.16
NetC282_2: C282.2 IC48.6
NetC284_2: C284.2 IC37.6
NetC293_1: C293.1 IC47.23
NetC293_2: C293.2 IC47.21 L15.1 T5.3 T5.7 T5.8
NetC310_2: C310.2 IC39.6
NetC395_2: C395.2 IC45.1 R212.2 R213.1
NetCN3_2: CN3.2 D2.1
NetD3_1: D3.1 IC47.7 R243.1
NetD3_2: D3.2 D4.1
NetD5_2: D5.2 J2.31
NetD7_3: D7.3 IC9.2 R27.2 R30.1
NetD8_3: D8.3 IC11.3 R33.2 R35.1
NetDS1_1: DS1.1 R160.2
NetDS1_3: DS1.3 R161.2
NetDS1_5: DS1.5 R162.2
NetDS1_7: DS1.7 R163.2
NetIC1_A11: IC1.A11 P2.5
NetIC1_A18: IC1.A18 R173.1
NetIC1_B10: IC1.B10 IC31.11
NetIC1_B18: IC1.B18 R172.1
NetIC1_D10: IC1.D10 IC31.12
NetIC1_E10: IC1.E10 P2.3
NetIC1_H12: IC1.H12 IC2.8 R13.1
NetIC1_J15: IC1.J15 IC2.7 R15.1
NetIC1_K14: IC1.K14 J2.29
NetIC1_L14: IC1.L14 IC2.6 R14.1
NetIC1_P5: IC1.P5 R2.1
NetIC1_R18: IC1.R18 R4.2
NetIC1_T13: IC1.T13 R142.1
NetIC1_T18: IC1.T18 R1.2
NetIC1_V14: IC1.V14 R143.1
NetIC2_1: IC2.1 X3.4
NetIC2_2: IC2.2 X3.1
NetIC2_9: IC2.9 R12.1
NetIC3_1: IC3.1 X4.4
NetIC3_2: IC3.2 X4.1
NetIC3_9: IC3.9 R16.1
NetIC5_3: IC5.3 IC5.4 R20.1 R139.2
NetIC5_5: IC5.5 R141.1
NetIC5_6: IC5.6 R140.1
NetIC5_7: IC5.7 R21.1
NetIC8_3: IC8.3 IC8.4 R22.1 R127.2
NetIC8_5: IC8.5 R150.1
NetIC8_6: IC8.6 R149.1
NetIC8_7: IC8.7 R148.1
NetIC11_1: IC11.1 R34.1
NetIC11_4: IC11.4 R37.1
NetIC12_2: IC12.2 P8.1 R42.1
NetIC12_3: IC12.3 R40.1
NetIC12_6: IC12.6 R41.1
NetIC13_11: IC13.11 R60.1
NetIC13_13: IC13.13 R64.1
NetIC13_14: IC13.14 R62.1
NetIC13_15: IC13.15 R61.2
NetIC13_25: IC13.25 R66.1
NetIC13_26: IC13.26 R67.1
NetIC14_5: IC14.5 R70.2
NetIC14_6: IC14.6 R73.2
NetIC14_11: IC14.11 R63.1
NetIC14_13: IC14.13 R69.2
NetIC14_14: IC14.14 R68.1
NetIC14_15: IC14.15 R65.2
NetIC14_25: IC14.25 R71.2
NetIC14_26: IC14.26 R72.2
NetIC15_2: IC15.2 IC16.28 IC49.2 R78.1
  other v4: 192.9,-35.208 192.4,-34.508 193.4,-34.508 192.9,-33.808
NetIC15_3: IC15.3 IC16.29 IC49.3 R76.1
NetIC15_7: IC15.7 R77.1
NetIC16_3: IC16.3 R220.1
NetIC16_6: IC16.6 R225.1
NetIC16_21: IC16.21 R223.1
NetIC16_22: IC16.22 R224.1
NetIC16_35: IC16.35 R75.1
NetIC16_36: IC16.36 R74.1
NetIC16_58: IC16.58 R83.2
NetIC16_62: IC16.62 R86.2
NetIC25_5: IC25.5 R164.2 R165.1
NetIC26_1: IC26.1 J2.15 R170.1
NetIC26_4: IC26.4 IC27.9
NetIC27_19: IC27.19 R167.1
NetIC32_7: IC32.7 R178.2 R180.1
NetIC33_AA24: IC33.AA24 IC36.F8 R56.1 | length 0.7
  Top Layer w0.175: v1(78,-6) IC33.AA24@78.5,-5.5
NetIC33_AE23: IC33.AE23 IC36.F7 | length 0.7
  Top Layer w0.175: v1(74,-5) IC33.AE23@74.5,-4.5
NetIC33_AF23: IC33.AF23 IC36.G8 R54.1 | length 0.7
  Top Layer w0.175: v1(73,-5) IC33.AF23@73.5,-4.5
NetIC33_AH20: IC33.AH20 R96.1 | length 0.7
  Top Layer w0.175: v1(71,-2) IC33.AH20@71.5,-1.5
NetIC33_AJ20: IC33.AJ20 R97.1 | length 0.7
  Top Layer w0.175: v1(70,-2) IC33.AJ20@70.5,-1.5
NetIC33_AN7: IC33.AN7 R59.2 | length 0.7
  Top Layer w0.175: v1(66,12) IC33.AN7@66.5,11.5
NetIC33_AP16: IC33.AP16 R217.1 R218.2 | length 0.7
  Top Layer w0.175: v1(65,3) IC33.AP16@65.5,2.5
NetIC33_E29: IC33.E29 R95.1 | length 0.7
  Top Layer w0.175: IC33.E29@94.5,-10.5 v1(95,-11)
NetIC33_F29: IC33.F29 R94.1 | length 0.7
  Top Layer w0.175: IC33.F29@93.5,-10.5 v1(94,-11)
NetIC33_J25: IC33.J25 R39.2 R40.2 | length 0.7
  Top Layer w0.175: IC33.J25@90.5,-6.5 v1(91,-7)
NetIC33_K8: IC33.K8 R43.2 R44.1 R158.2 | length 0.7
  Top Layer w0.175: IC33.K8@89.5,10.5 v1(90,11)
NetIC33_Y24: IC33.Y24 IC36.B4 R57.1 | length 0.7
  Top Layer w0.175: v1(79,-6) IC33.Y24@79.5,-5.5
NetIC34_7: IC34.7 R185.2 R188.2
NetIC35_7: IC35.7 R186.2 R189.2
NetIC36_E6: IC36.E6 R58.1
NetIC36_F6: IC36.F6 R50.2
NetIC37_7: IC37.7 R196.2 R198.1
NetIC39_7: IC39.7 R204.2 R205.1
NetIC40_3: IC40.3 R194.1
NetIC41_7: IC41.7 R147.2
NetIC41_8: IC41.8 R151.2
NetIC41_10: IC41.10 R146.2
NetIC41_14: IC41.14 R144.2
NetIC41_24: IC41.24 R197.1
NetIC42_H11: IC42.H11 R215.2 | length 0.7
  Top Layer w0.175: v1(118.25,-3.9) IC42.H11@118.75,-3.4
NetIC43_H11: IC43.H11 R216.2
NetIC46_2: IC46.2 R230.1 R231.1
NetIC46_5: IC46.5 R228.2 R238.1
NetIC46_9: IC46.9 T2.4
NetIC46_11: IC46.11 T2.2
NetIC46_13: IC46.13 R209.1
NetIC46_14: IC46.14 R210.2 R227.2
NetIC46_18: IC46.18 R229.1
NetIC46_20: IC46.20 T3.2
NetIC46_22: IC46.22 T3.4
NetIC47_2: IC47.2 R241.1 R242.1
NetIC47_5: IC47.5 R206.1 R234.1
NetIC47_9: IC47.9 T4.4
NetIC47_11: IC47.11 T4.2
NetIC47_13: IC47.13 R232.1
NetIC47_14: IC47.14 R233.2 R235.2
NetIC47_18: IC47.18 R240.1
NetIC47_20: IC47.20 T5.2
NetIC47_22: IC47.22 T5.4
NetIC48_7: IC48.7 R236.2 R237.1
NetP1_1: P1.1 R77.2
NetP3_1: P3.1 R41.2
NetP7_1: P7.1 R152.2 Tr2.6
NetP7_2: P7.2 R153.2 Tr2.4
NetR98_2: R98.2 R101.2
NetR99_2: R99.2 R103.2
NetR100_2: R100.2 R104.2 R106.1
NetR102_2: R102.2 R105.2 R107.1
NetR108_2: R108.2 R112.2
NetR109_2: R109.2 R113.2
NetR110_2: R110.2 R114.2 R116.1
NetR111_2: R111.2 R115.2 R117.1
NetR118_2: R118.2 R121.2
NetR119_2: R119.2 R123.2
NetR120_2: R120.2 R124.2 R126.1
NetR122_2: R122.2 R125.2 R127.1
NetR130_2: R130.2 R133.2
NetR131_2: R131.2 R135.2
NetR132_2: R132.2 R136.2 R138.1
NetR134_2: R134.2 R137.2 R139.1
NRST: IC1.T16 IC41.15
PC0: IC1.E16 J2.33
PC1: IC1.D17 J2.35
PC2: IC1.D16 J2.37
PC3: IC1.C15 J2.39
PC4: IC1.E14 J2.41
PC5: IC1.B16 J2.43
PC6: IC1.D13 J2.45
PC7: IC1.B15 J2.47
PC8: IC1.C14 J2.49
PC9: IC1.B14 J2.51
PC10: IC1.D15 J2.53
PC11: IC1.E13 J2.55
PC12: IC1.A15 J2.57
PC13: IC1.F13 J2.59
PC14: IC1.C13 J2.61
PC15: IC1.E12 J2.63
PCK3: IC1.M4 R183.1
PE0: IC1.K3 J1.82
PE1: IC1.K4 J1.84
PE2: IC1.L6 J1.86
PE3: IC1.L7 J1.88
PE4: IC1.L2 J1.90
PE5: IC1.L5 J1.92
PE6: IC1.K1 J1.94
PE7: IC1.L4 J1.96
PLL_CONTROL.PLL_CS: IC16.17 IC33.AK18 | length 0.7
  Top Layer w0.175: v1(69,0) IC33.AK18@69.5,0.5
PLL_CONTROL.PLL_LOCK: IC33.AF18 R219.1 R220.2 | length 0.7
  Top Layer w0.175: v1(73,0) IC33.AF18@73.5,0.5
PLL_CONTROL.PLL_REFSEL: IC16.7 IC33.AK16 | length 0.7
  Top Layer w0.175: v1(69,3) IC33.AK16@69.5,2.5
PLL_CONTROL.PLL_RESET: IC13.12 IC14.12 IC16.23 IC33.AL16 | length 0.7
  Top Layer w0.175: v1(68,3) IC33.AL16@68.5,2.5
PLL_CONTROL.PLL_SCLK: IC16.16 IC33.AE16 | length 0.7
  Top Layer w0.175: v1(74,3) IC33.AE16@74.5,2.5
PLL_CONTROL.PLL_SDI: IC33.AH19 R222.1 R224.2 | length 0.7
  Top Layer w0.175: v1(71,-1) IC33.AH19@71.5,-0.5
PLL_CONTROL.PLL_SDO: IC33.AJ19 R221.1 R223.2 | length 0.7
  Top Layer w0.175: v1(70,-1) IC33.AJ19@70.5,-0.5
PLL_CONTROL.PLL_STAT: IC33.AE18 R225.2 R226.1 | length 0.7
  Top Layer w0.175: v1(74,0) IC33.AE18@74.5,0.5
PLL_CONTROL.PLL_SYNC: IC16.8 IC33.AG18 | length 0.7
  Top Layer w0.175: v1(72,0) IC33.AG18@72.5,0.5
PPS_OUT: IC12.5 IC33.U23 | length 0.7
  Top Layer w0.175: IC33.U23@82.5,-4.5 v1(83,-5)
PROGRAM_B: D9.3 D10.3 IC33.L8 IC36.D4 R55.1 | length 0.7
  Top Layer w0.175: IC33.L8@88.5,10.5 v1(89,11)
Q1_A0: IC33.A24 IC42.B4 RP5.2 | length 35.9
  Top Layer w0.175: IC33.A24@98.5,-5.5 99.35,-5.5 101.6,-7.75 101.6,-9.95 105.2,-13.55 124.75,-13.55 126.25,-12.05 126.25,-9.9 IC42.B4@125.75,-9.4